# EAGLE board 2PLUS Osc Breakout Euro PANEL (EAGLE 7.7.0)
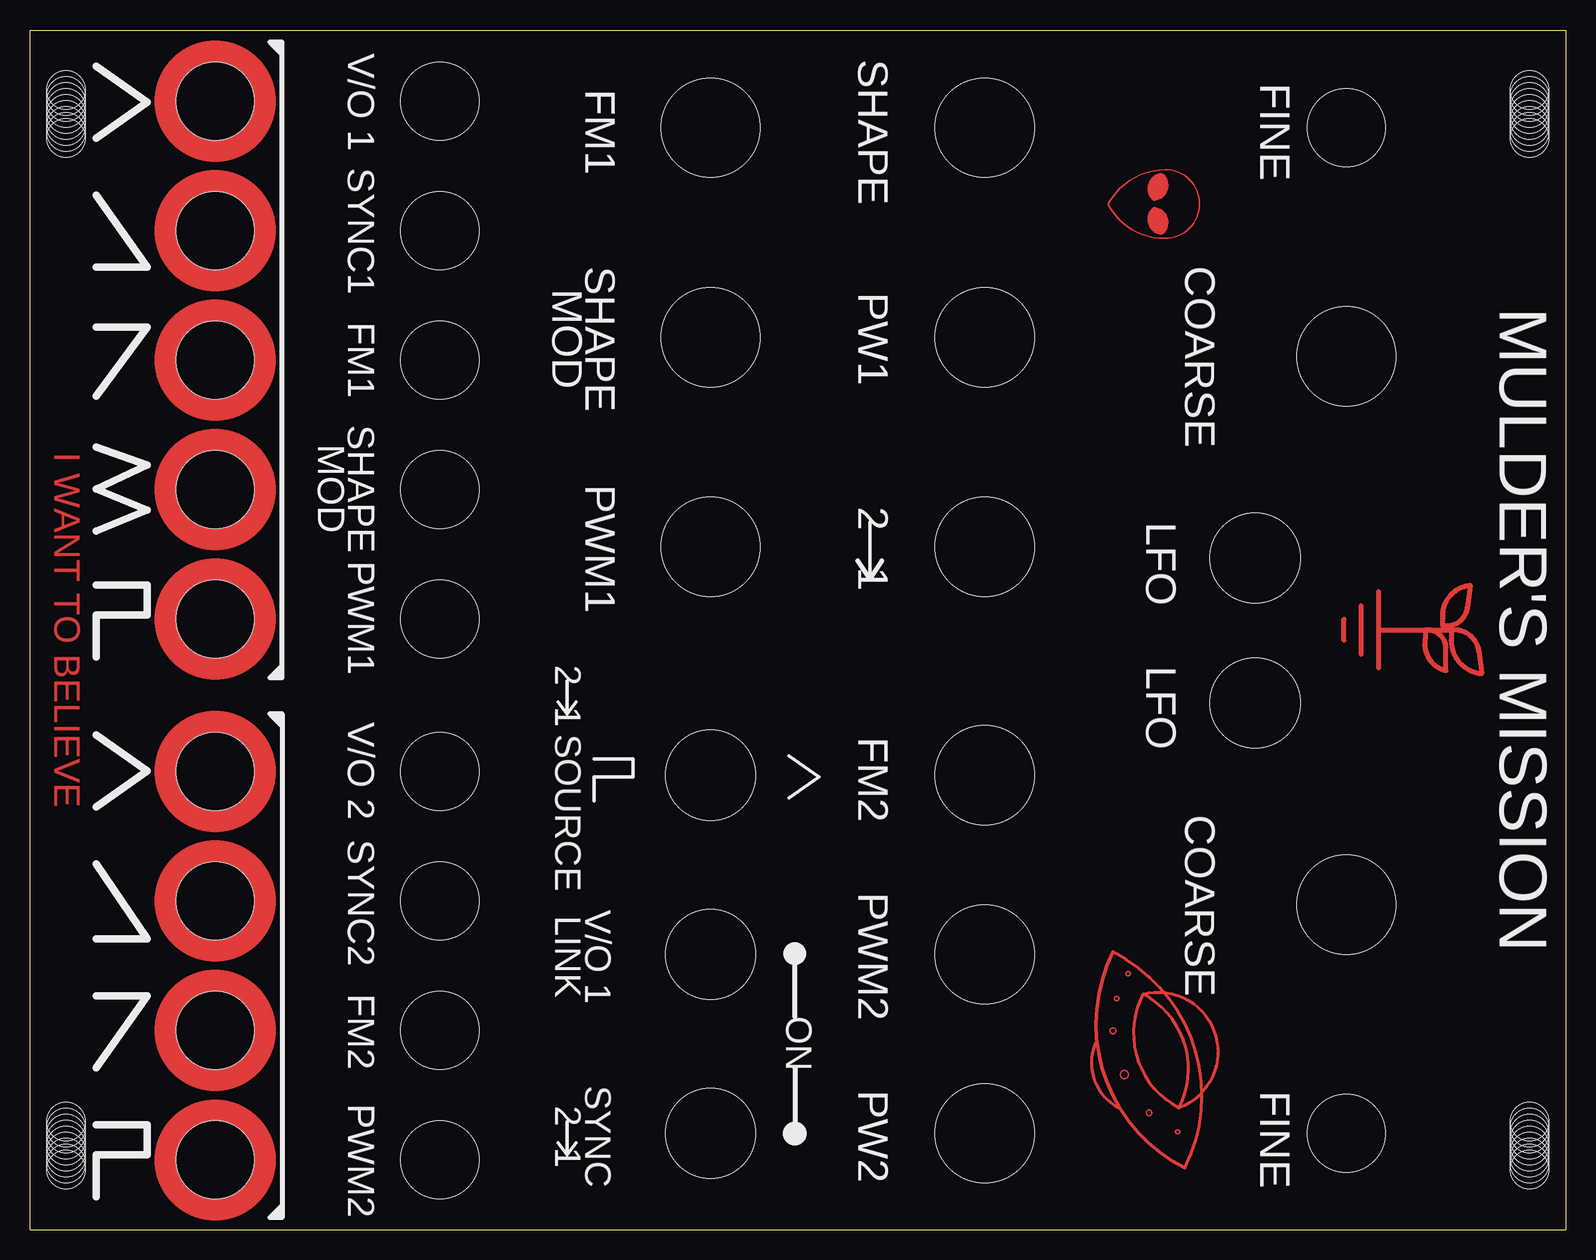
[diagram p0: board, top side]
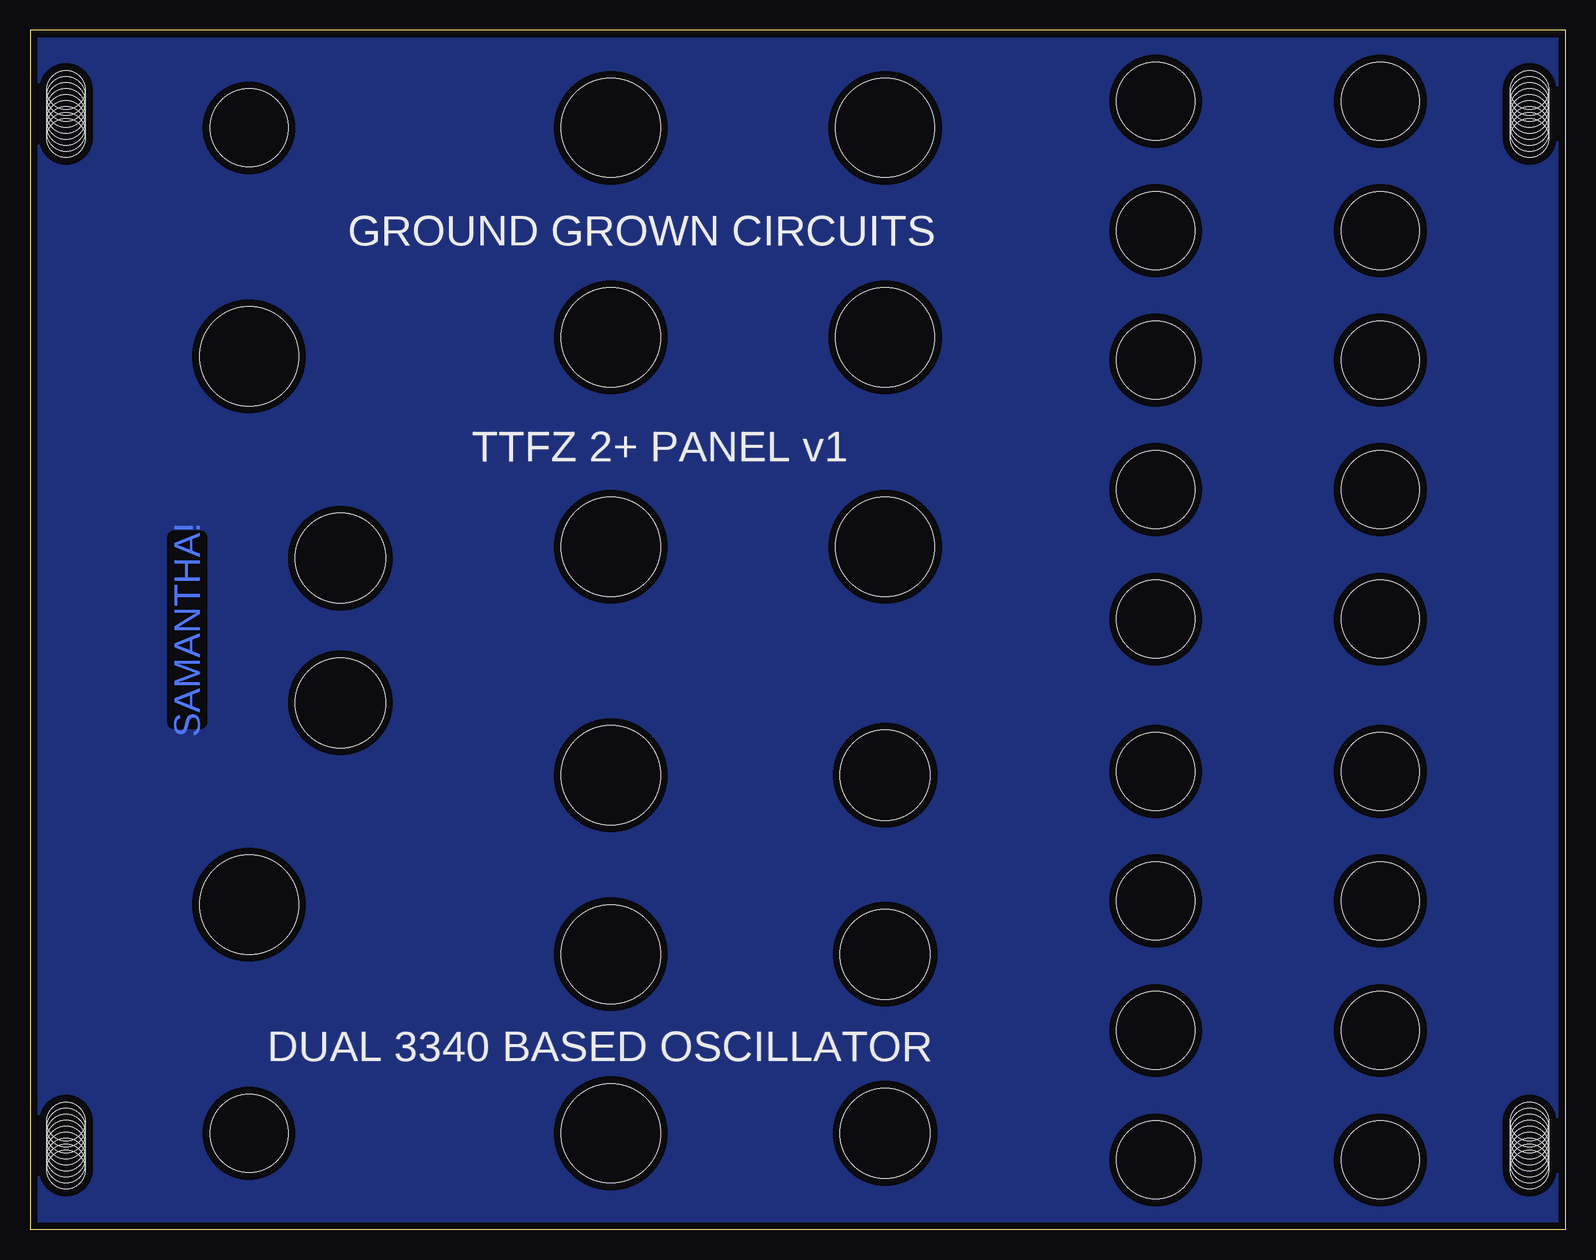
[diagram p1: board, bottom side, seen from below]

Size 128 x 100 mm. Coordinates in mm from the lower left corner, seen from the top.
Outline: 0,0 128,0 128,100 0,100 0,0
Copper layers (1*16): Top 0.035mm / dielectric 1.5mm / Bottom 0.035mm
Design rules "SparkFun": minimum track width 8mil, minimum drill 20mil, track to track 8mil, track to pad 8mil, pad to pad 8mil, via to via 8mil, smd to smd 8mil, copper to edge 8mil, drill to drill 8mil, minimum pad ring 12mil, minimum via ring 10mil, stop-mask expansion 4mil, vias tented up to drill 20mil, thermal gap 10mil

## Footprints (pad centres in the part's own frame; a part is rotated, then mirrored left to right if it is on the bottom)
MOUNT_DRILL = hole 3.2: 3,9; 3,8.5; 3,8; 3,7.5; 3,7; 3,6.5; 3,6; 3,5.5; 3,5
JACK_DRILL_COPPER_SM = hole 6.5: 0,0
JACK_DRILL = hole 6.5: 0,0
POT_DRILL = hole 8.25: 0,0
SWITCH_DRILL = hole 7.5: 0,0

## Placement (x,y rotation side)
E$1  [MOUNT_DRILL]  0,0 0 top
E$2  [MOUNT_DRILL]  0,100 180 bottom
E$3  [MOUNT_DRILL]  128,100 180 top
E$4  [MOUNT_DRILL]  128,0 0 bottom
E$5  [JACK_DRILL_COPPER_SM]  15.44,72.48 0 top
E$6  [JACK_DRILL_COPPER_SM]  15.44,61.68 0 top
E$7  [JACK_DRILL_COPPER_SM]  15.44,38.19 0 top
E$8  [JACK_DRILL_COPPER_SM]  15.44,5.8 0 top
E$9  [JACK_DRILL_COPPER_SM]  15.44,16.6 0 top
E$10  [JACK_DRILL_COPPER_SM]  15.44,27.39 0 top
E$11  [JACK_DRILL_COPPER_SM]  15.44,50.89 0 top
E$12  [JACK_DRILL_COPPER_SM]  15.44,83.27 0 top
E$13  [JACK_DRILL_COPPER_SM]  15.44,94.07 0 top
E$14  [JACK_DRILL]  34.17,50.89 0 top
E$15  [JACK_DRILL]  34.17,61.68 0 top
E$16  [JACK_DRILL]  34.17,72.48 0 top
E$17  [JACK_DRILL]  34.17,83.27 0 top
E$18  [JACK_DRILL]  34.17,94.07 0 top
E$19  [JACK_DRILL]  34.17,38.19 0 top
E$20  [JACK_DRILL]  34.17,27.39 0 top
E$21  [JACK_DRILL]  34.17,16.6 0 top
E$22  [JACK_DRILL]  34.17,5.8 0 top
E$23  [POT_DRILL]  56.72,91.84 0 top
E$24  [POT_DRILL]  56.72,56.92 0 top
E$25  [POT_DRILL]  56.72,74.38 0 top
E$26  [POT_DRILL]  79.58,91.84 0 top
E$27  [POT_DRILL]  79.58,74.38 0 top
E$28  [POT_DRILL]  79.58,56.92 0 top
E$29  [POT_DRILL]  79.58,37.87 0 top
E$30  [POT_DRILL]  79.58,22.95 0 top
E$31  [POT_DRILL]  79.58,8.03 0 top
E$32  [JACK_DRILL]  109.74,8.03 0 top
E$33  [POT_DRILL]  109.74,27.07 0 top
E$34  [POT_DRILL]  109.74,72.8 0 top
E$35  [JACK_DRILL]  109.74,91.84 0 top
E$36  [SWITCH_DRILL]  56.72,37.87 0 top
E$37  [SWITCH_DRILL]  56.72,22.95 0 top
E$38  [SWITCH_DRILL]  56.72,8.03 0 top
E$39  [SWITCH_DRILL]  102.12,55.97 0 top
E$40  [SWITCH_DRILL]  102.12,43.9 0 top
E$41  [LOGO_MED_COPPER]  112.5,50 270 top
E$42  [UFO_TRACE]  92.5,14.5 0 top
E$43  [ALIEN_TRACE]  94,85.5 270 top

## Library data of the parts
E$1-E$43 = GroundGrownCircuits

## Tracks (layer width: path | path; a pad name or v marks a point on that pad's centre or on a via)
S$1
  pour Bottom (isolate 0.61): 0,0 0,100 128,100 128,0

## Text on the board
Top: I WANT TO BELIEVE
Bottom: SAMANTHA!
tPlace: V/O 1 | FM1 | SHAPE | FINE | SYNC1 | MOD | SHAPE | PW1 | COARSE | FM1 | MOD | SHAPE | PWM1 | 2 1 | LFO | PWM1 | MULDER'S MISSION | 2 1 | LFO | V/O 2 | FM2 | SOURCE | SYNC2 | COARSE | LINK | V/O 1 | PWM2 | FM2 | ON | 2 1 | SYNC | PW2 | FINE | PWM2
bPlace: GROUND GROWN CIRCUITS | TTFZ 2+ PANEL v1 | DUAL 3340 BASED OSCILLATOR